# EAGLE board MAX11609EEE-Breakout-Board (EAGLE 6.5.0)
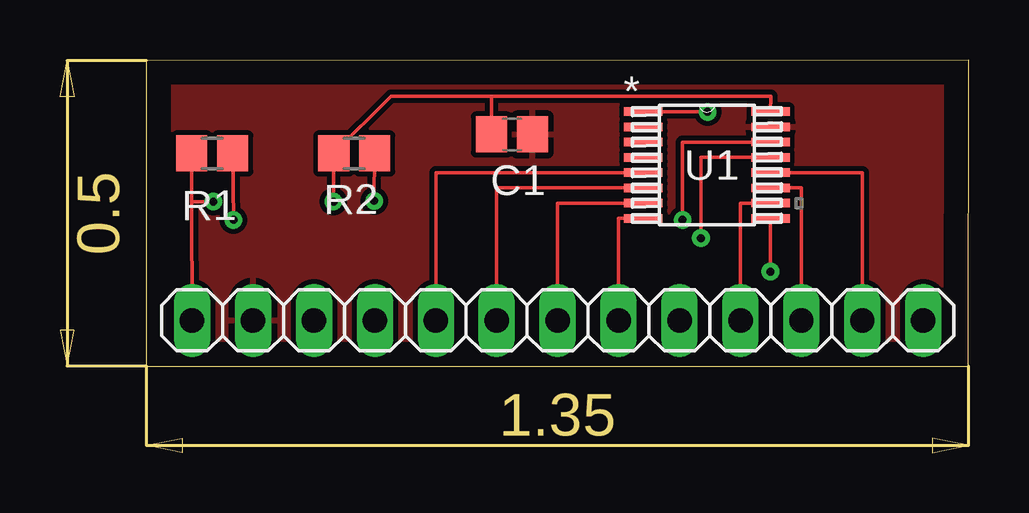
[diagram p0: board, top side]
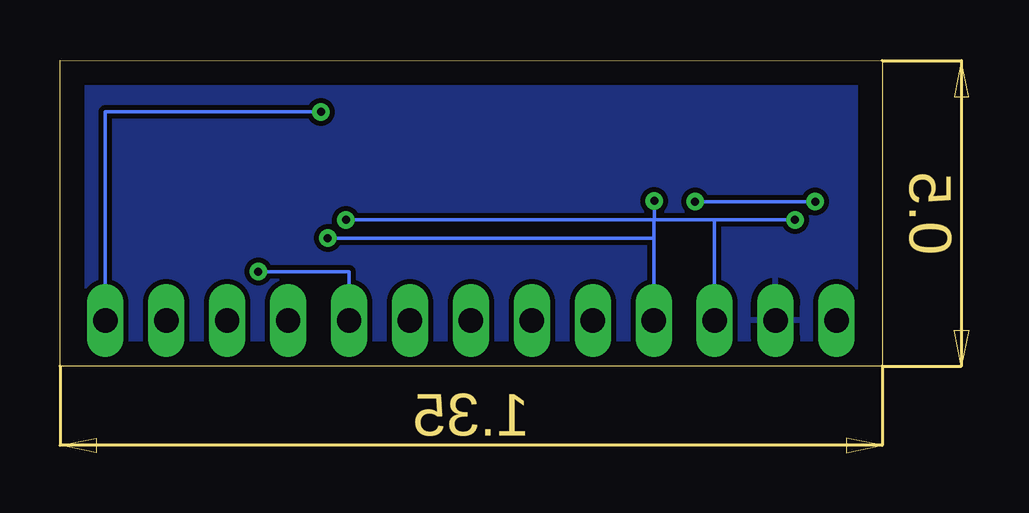
[diagram p1: board, bottom side, seen from below]

Size 34.27 x 12.76 mm. Coordinates in mm from the lower left corner, seen from the top.
Outline: 0,0 34.27,0 34.27,12.76 0,12.73 0,0
Copper layers (1*16): Top 0.035mm / dielectric 1.5mm / Bottom 0.035mm
Design rules "default": minimum track width 10mil, minimum drill 24mil, track to track 8mil, track to pad 8mil, pad to pad 8mil, via to via 8mil, smd to smd 8mil, copper to edge 40mil, drill to drill 8mil, minimum pad ring 10mil, minimum via ring 8mil, stop-mask expansion 4mil, vias tented up to drill 0mil, thermal gap 10mil

## Footprints (pad centres in the part's own frame; a part is rotated, then mirrored left to right if it is on the bottom)
C0805 = smd 1.3 x 1.5: 1 -0.85,0; 2 0.85,0
1X13 = drill 1.016 long: 1 -15.24,0; 2 -12.7,0; 3 -10.16,0; 4 -7.62,0; 5 -5.08,0; 6 -2.54,0; 7 0,0; 8 2.54,0; 9 5.08,0; 10 7.62,0; 11 10.16,0; 12 12.7,0; 13 15.24,0
R0805 = smd 1.3 x 1.5: 1 -0.85,0; 2 0.85,0
21-0055H_16 = smd 1.6 x 0.356: 1 -2.654,2.223; 2 -2.654,1.587; 3 -2.654,0.953; 4 -2.654,0.318; 5 -2.654,-0.318; 6 -2.654,-0.953; 7 -2.654,-1.587; 8 -2.654,-2.223; 9 2.654,-2.223; 10 2.654,-1.587; 11 2.654,-0.953; 12 2.654,-0.318; 13 2.654,0.318; 14 2.654,0.953; 15 2.654,1.587; 16 2.654,2.223

## Placement (x,y rotation side)
C1  0.1uF  [C0805]  15.24,9.65 0 top
JP3  [1X13]  17.14,1.91 0 top
R1  4.7k  [R0805]  2.74,8.86 180 top
R2  4.7k  [R0805]  8.66,8.86 180 top
U1  MAX11609EEE+  [21-0055H_16]  23.37,8.38 0 top

## Library data of the parts
C1 R1 R2 = resistor
JP3 = pinhead
U1 = MAX11609EEE; MANUFACTURER_NAME: Maxim; MANUFACTURER_PART_NUMBER: MAX11609EEE+; VENDOR: Maxim

## Nets
AIN0: JP3.5 U1.5
AIN1: JP3.6 U1.6
AIN2: JP3.7 U1.7
AIN3: JP3.8 U1.8
AIN4: JP3.9 U1.9
AIN5: JP3.10 U1.10
AIN6: JP3.11 U1.11
AIN7: JP3.12 U1.12
GND: C1.2 JP3.2 U1.15
REF: JP3.13 U1.1
SCL: JP3.4 R2.1 U1.13
SDA: JP3.3 R1.1 U1.14
VDD: C1.1 JP3.1 R1.2 R2.2 U1.16

## Tracks (layer width: path | path; a pad name or v marks a point on that pad's centre or on a via)
AIN0
  Top 0.152: U1.5 12.06,8.06 JP3.5
AIN1
  Top 0.152: U1.6 14.61,7.43 JP3.6
AIN2
  Top 0.152: U1.7 17.14,6.79 JP3.7
AIN3
  Top 0.152: U1.8 19.68,6.16 JP3.8
AIN4  (via drill 0.33)
  Top 0.152: U1.9 v26.01,3.94
  Bottom 0.152: v26.01,3.94 22.23,3.94 JP3.9
AIN5
  Top 0.152: U1.10 24.77,6.79 JP3.10
AIN6
  Top 0.152: U1.11 27.3,7.43 JP3.11
AIN7
  Top 0.152: U1.12 29.84,8.06 JP3.12
GND
  pour Top: -0.74,12.98 34.82,12.98 34.8,-0.51 -0.76,-0.51
  pour Bottom: -0.51,12.95 35.05,12.95 35.05,-0.51 -0.51,-0.51
REF  (via drill 0.33)
  Top 0.152: U1.1 v23.39,10.59
  Bottom 0.152: v23.39,10.59 32.38,10.59 JP3.13
SCL  (via drill 0.33)
  Top 0.152: v23.11,5.33 23.11,8.7 U1.13 | R2.1 v9.5,6.88
  Bottom 0.152: JP3.4 9.53,5.33 | 9.53,5.33 v23.11,5.33 | v9.5,6.88 9.53,5.33
SDA  (via drill 0.33)
  Top 0.152: v22.35,6.1 22.35,9.34 U1.14 | R1.1 v3.63,6.1
  Bottom 0.152: JP3.3 6.99,6.1 | 6.99,6.1 v22.35,6.1 | v3.63,6.1 6.99,6.1
VDD  (via drill 0.33)
  Top 0.152: v7.8,6.86 7.81,7.56 R2.2 10.2,11.25 14.39,11.25 | C1.1 14.39,11.25 | 14.39,11.25 26.04,11.25 U1.16 | JP3.1 1.9,6.86 | 1.9,6.86 R1.2 | v2.79,6.86 1.9,6.86
  Bottom 0.152: v2.79,6.86 v7.8,6.86